# EAGLE board I2C-OneWire_Probes (EAGLE 9.6.2)
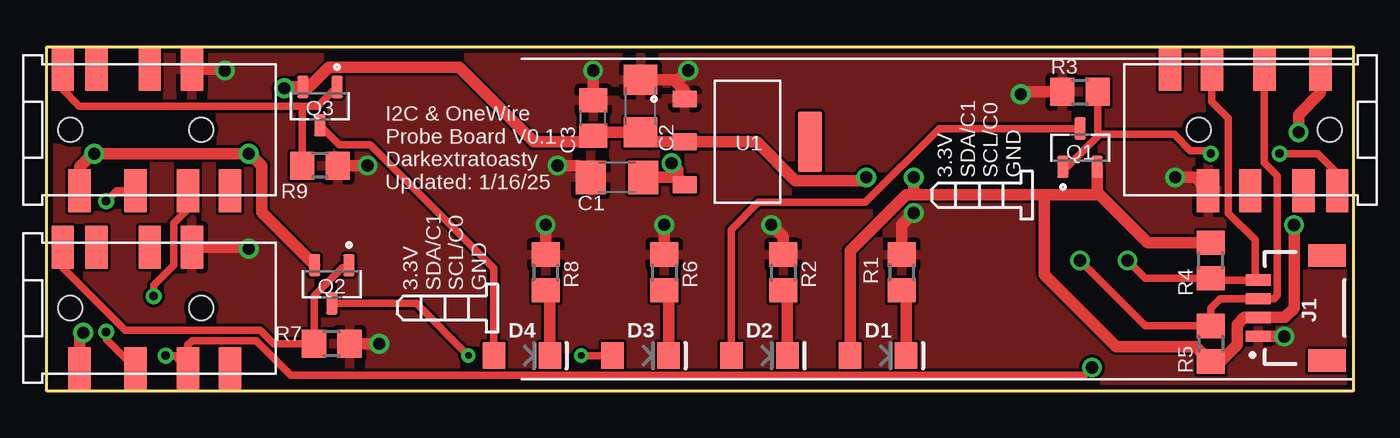
[diagram p0: board, top side]
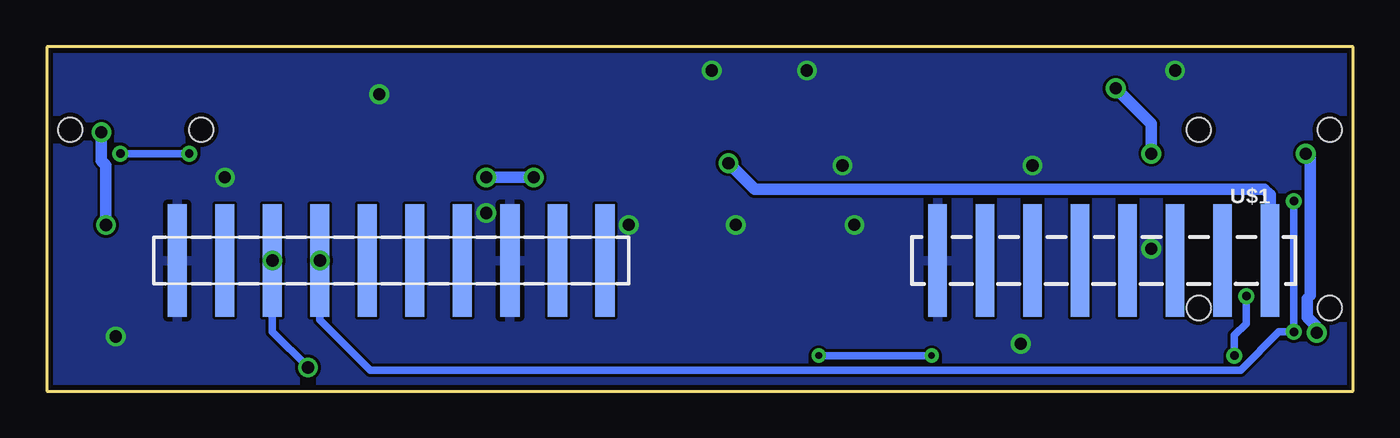
[diagram p1: board, bottom side, seen from below]

Size 69.85 x 18.41 mm. Coordinates in mm from the lower left corner, seen from the top.
Outline: 0,18.41 69.85,18.41 69.85,0 0,0 0,18.41
Copper layers (1*16): Top 0.035mm / dielectric 1.5mm / Bottom 0.035mm
Design rules "default *": minimum track width 6mil, minimum drill 0.35mm, track to track 6mil, track to pad 6mil, pad to pad 6mil, via to via 6mil, smd to smd 6mil, copper to edge 10mil, drill to drill 6mil, minimum pad ring 10mil, minimum via ring 8mil, stop-mask expansion 4mil, vias tented up to drill 0mil, thermal gap 10mil

## Footprints (pad centres in the part's own frame; a part is rotated, then mirrored left to right if it is on the bottom)
C3216 = smd 1.6 x 1.8: 1 -1.4,0; 2 1.4,0
C0805 = smd 1.3 x 1.5: 1 -0.95,0; 2 0.95,0
LED-1206 = smd 1.2 x 1.4: A -1.5,0; C 1.5,0
JST04_1MM_RA = smd 0.6 x 1.35: 1 -1.5,0; 2 -0.5,0; 3 0.5,0; 4 1.5,0 | smd 1.2 x 2: NC1 2.8,-3.675; NC2 -2.8,-3.675
AO3401 = smd 1.18 x 0.61: 1 -1.025,0.915; 2 -1.025,-0.915; 3 1.025,0
R0805 = smd 1.3 x 1.5: 1 -0.95,0; 2 0.95,0
SOT229P700X180-4N = smd 1.31 x 0.93: 1 -3.345,2.29; 2 -3.345,0; 3 -3.345,-2.29 | smd 1.31 x 3.24: 4 3.345,0
BOTH-SMD = smd 1.02 x 6 bottom: 1 7.62,0; 2 10.16,0; 3 12.7,0; 4 15.24,0; 5 17.78,0; 6 20.32,0; 7 22.86,0; 8 25.4,0; 9 27.94,0; 10 30.48,0 | smd 1 x 6 bottom: 19 -27.94,-0.001; 20 -22.86,-0.001; 21 -20.32,0.001; 22 -17.78,-0.001; 23 -15.24,0.001; 24 -12.7,-0.001; 25 -10.16,0.001; 26 -25.4,-0.001
PJ-3938PJ = smd 2.3 x 1.2: P$1 -3.25,6.5; P$2 -3.25,3.5; P$3 -3.25,0.7; P$4 -3.25,-1.55; P$5 3.25,0.5; P$6 3.25,2.75; P$7 3.25,5.6; P$8 3.25,7.4 | hole 1.3: 0,0; 0,7

## Placement (x,y rotation side)
C1  22uf  [C3216]  30.48,11.43 180 top
C2  22uf  [C3216]  31.75,15.24 90 top
C3  100nf  [C0805]  29.21,14.61 90 top
D1  Red  [LED-1206]  44.45,1.91 0 top
D2  Blue  [LED-1206]  38.1,1.91 0 top
D3  Blue  [LED-1206]  31.75,1.91 0 top
D4  Blue  [LED-1206]  25.4,1.91 0 top
J1  QWIIC_RIGHT_ANGLE  [JST04_1MM_RA]  64.77,4.45 90 top
Q1  AO3401  [AO3401]  55.24,13.02 90 top
Q2  AO3401  [AO3401]  15.24,5.71 270 top
Q3  AO3401  [AO3401]  14.61,15.24 270 top
R1  2k2  [R0805]  45.72,6.35 90 top
R2  2k2  [R0805]  39.37,6.35 270 top
R3  10k  [R0805]  55.24,16 0 top
R4  10k  [R0805]  62.23,6.99 90 top
R5  10k  [R0805]  62.23,2.54 270 top
R6  2k2  [R0805]  33.02,6.35 270 top
R7  10k  [R0805]  15.24,2.54 180 top
R8  2k2  [R0805]  26.67,6.35 270 top
R9  10k  [R0805]  14.61,12.06 180 top
U1  AMS1117-3.3  [SOT229P700X180-4N]  37.47,13.34 0 top
U$1  BOTH-SMD  [BOTH-SMD]  32.38,6.99 0 top
U$2  PJ-3938PJ  [PJ-3938PJ]  61.59,13.97 270 top
U$3  PJ-3938PJ  [PJ-3938PJ]  8.26,4.45 90 top
U$4  PJ-3938PJ  [PJ-3938PJ]  8.26,13.97 90 top

## Library data of the parts
C1-C3 = rcl; SPICEPREFIX: C
D1 = SparkFun-LED; PROD_ID: DIO-09912
D2-D4 = SparkFun-LED; PROD_ID: DIO-09911
J1 = SparkFun-Connectors; PROD_ID: CONN-13694
Q1-Q3 = DMG2305UX-7; MANUFACTURER: Diodes Inc.; MAXIMUM_PACKAGE_HEIGHT: 1.1mm; PARTREV: 09/2018; STANDARD: IPC-7351B
R1-R9 = rcl; SPICEPREFIX: R
U1 = AMS1117-3.3; AVAILABILITY: Not in stock; CHECK_PRICES: https://www.snapeda.com/parts/AMS1117-3.3/Advanced+Monolithic+Systems/view-part/?ref=eda; DESCRIPTION: Sot223/Pkg 1-Amp 3.3-Volt Low Drop Out Voltage Regulatator; MF: Advanced Monolithic Systems; MP: AMS1117-3.3; PACKAGE: SOT-223 Seeed Technology; PRICE: None; SNAPEDA_LINK: https://www.snapeda.com/parts/AMS1117-3.3/Advanced+Monolithic+Systems/view-part/?ref=snap
U$1 = Flipper-Zero-GPIO-Headers
U$2-U$4 = PJ-3938PJ

## Nets
+3V3: C2.1 C3.1 D1.A J1.2 Q1.2 Q2.2 Q3.2 R4.2 R5.2 U1.2 U$2.P$1 U$3.P$1 U$4.P$1
+5V: C1.1 U1.3 U$1.19
GND: C1.2 C2.2 C3.2 J1.1 R1.2 R2.1 R3.1 R6.1 R7.1 R8.1 R9.1 U1.1 U$1.3 U$1.10 U$1.25 U$2.P$5 U$3.P$5 U$4.P$5
N$1: D2.A Q1.3
N$2: D2.C R2.2
N$3: Q1.1 R3.2 U$2.P$8
N$5: D3.C R6.2
N$6: Q2.1 R7.2 U$3.P$8
N$8: D4.C R8.2
N$9: Q3.1 R9.2 U$4.P$8
N$10: D1.C R1.1
N$11: D3.A Q2.3
N$12: D4.A Q3.3
SCL: J1.4 R4.1 U$1.8 U$2.P$3 U$3.P$3 U$4.P$3
SDA: J1.3 R5.1 U$1.7 U$2.P$2 U$3.P$2 U$4.P$2

## Tracks (layer width: path | path; a pad name or v marks a point on that pad's centre or on a via)
+3V3  (via drill 0.65)
  Top 0.61: R4.2 58.86,7.93 56.29,10.51 | D1.A 42.95,7.51 45.95,10.51 46.35,10.51 | 56.29,10.51 53.34,10.51 | 53.34,10.51 46.35,10.51 | 53.34,10.51 53.34,6.23 57.18,2.38 61.44,2.38 R5.2 62.76,1.59 63.64,2.47 63.64,3.56 64.02,3.94 J1.2 66.2,3.94 66.68,4.43 v66.68,8.89 | U$2.P$1 68.09,15.95 66.93,14.78 v66.93,13.84 | v43.81,11.43 43.64,11.26 40.02,11.26 37.95,13.34 U1.2 32.26,13.34 C2.1 29.39,13.84 C3.1 28.89,13.34 26.04,13.34 22.06,17.31 15.07,17.31 14.02,16.27 Q3.2 12.77,16.27 v12.7,16.19 | v46.35,11.43 46.35,10.51 | U$4.P$1 1.75,11.99 2.46,12.7 v2.54,12.7 v10.79,12.7 10.86,12.7 11.5,12.06 11.5,9.57 Q2.2 | U$3.P$1 1.75,2.92 v1.96,3.12 | Q1.2 56.16,10.64 56.29,10.51
  Bottom 0.61: v66.93,13.84 v66.92,13.84 66.92,12.33 66.68,12.09 v66.68,8.89 | v43.81,11.43 v46.35,11.43 | v1.96,3.12 1.96,3.44 2.46,3.94 2.46,4.95 2.29,5.12 2.29,12.45 v2.54,12.7 | v10.79,12.7 10.79,14.29 v12.7,16.19
+5V  (via drill 0.65)
  Top 0.61: C1.1 33.73,11.43 | 33.73,11.43 U1.3 | v33.4,12.19 33.73,11.86 33.73,11.43
  Bottom 0.61: U$1.19 4.45,10.5 4.74,10.79 32,10.79 v33.4,12.19
GND  (via drill 0.65)
  Top 0.61: R1.2 45.72,8.89 v46.35,9.53 | R2.1 39.37,8.26 v38.73,8.89 | R6.1 v33.02,8.89 | R8.1 v26.67,8.89 | R7.1 v17.78,2.54 | R9.1 v17.14,12.06 | U$4.P$5 9.45,17.22 v9.53,17.14 | U$3.P$5 10.72,7.7 v10.79,7.62 | R3.1 52.2,16 v52.07,15.88 | U$2.P$5 61.38,11.43 v60.33,11.43 | J1.1 66.14,2.94 v66.17,2.92 | C1.2 28.45,12.06 v27.3,12.06 | C3.2 v29.21,17.14 | C2.2 33.52,16.64 | U1.1 34.12,16.05 33.52,16.64 | 33.52,16.64 33.78,16.64 v34.29,17.14
  pour Top: 0,18.41 69.85,18.41 69.85,0 0,0
  pour Bottom: 0,18.41 69.85,18.41 69.85,0 0,0
N$1
  Top 0.406: Q1.3 47.72,14.04 43.77,10.09 38.05,10.09 36.6,8.64 D2.A
N$2
  Top 0.61: D2.C 39.6,5.17 R2.2
N$3  (via drill 0.45)
  Top 0.406: v62.23,12.7 62.07,12.86 61.14,12.86 60.27,13.72 56.28,13.72 56.2,13.64 | v65.91,12.7 67.94,12.7 69,11.65 U$2.P$8 | 56.2,13.64 54.55,11.99 Q1.1 | R3.2 56.2,13.64
  Bottom 0.406: v62.23,12.7 v65.91,12.7
N$5
  Top 0.61: D3.C 33.25,5.17 R6.2
N$6
  Top 0.406: U$3.P$8 0.85,6.61 4.2,3.26 11.42,3.26 12.14,2.54 R7.2 14.29,5.09 15.79,6.59 16.16,6.59 Q2.1
N$8
  Top 0.61: D4.C 26.9,5.17 R8.2
N$9
  Top 0.406: U$4.P$8 0.85,16.13 1.75,15.24 13.65,15.24 | 13.65,15.24 14.49,15.24 Q3.1 | 13.65,15.24 R9.2
N$10
  Top 0.61: D1.C 45.95,5.17 R1.1
N$11  (via drill 0.35)
  Top 0.406: Q2.3 19.76,4.69 v22.54,1.91 | v28.57,1.91 D3.A
  Bottom 0.406: v22.54,1.91 v28.57,1.91
N$12
  Top 0.406: Q3.3 15.65,13.17 17.29,13.17 23.9,6.56 D4.A
SCL  (via drill 0.45, 0.65)
  Top 0.406: U$1.8 58.73,6.04 R4.1 62.32,5.95 J1.4 64.61,6.11 64.61,8.1 63.18,9.53 63.18,14.59 62.3,15.47 U$2.P$3 | v55.88,1.27 55.46,0.85 13.04,0.85 11.19,2.7 7.78,2.7 7.55,2.47 U$3.P$3 | U$3.P$3 | U$3.P$3 6.84,1.91 v6.35,1.91 | v5.71,5.08 5.71,5.65 6.8,6.74 6.8,8.99 7.55,9.75 U$4.P$3
  Bottom 0.406: v55.88,1.27 57.78,3.17 U$1.8 | v5.71,5.08 5.71,3.62 6.35,2.98 v6.35,1.91
  other vias: 57.78,6.99
SDA  (via drill 0.45, 0.65)
  Top 0.406: U$1.7 58.74,3.49 R5.1 62.23,4.45 62.73,4.95 J1.3 65.63,4.95 65.8,5.12 65.8,11.52 65.09,12.22 U$2.P$2 | U$3.P$2 3.17,2.77 v3.17,3.17 | v3.17,10.16 3.73,10.72 U$4.P$2
  Bottom 0.406: v3.17,10.16 v3.17,3.17 3.97,3.17 6.03,1.12 52.56,1.12 55.24,3.81 U$1.7
  other vias: 55.24,6.99

## Text on the board
tNames: I2C & OneWire / Probe Board V0.1 / Darkextratoasty / Updated: 1/16/25 | 3.3V / SDA/C1 / SCL/C0 / GND | 3.3V / SDA/C1 / SCL/C0 / GND